# EAGLE board Schematic1 (EAGLE 9.6.2)
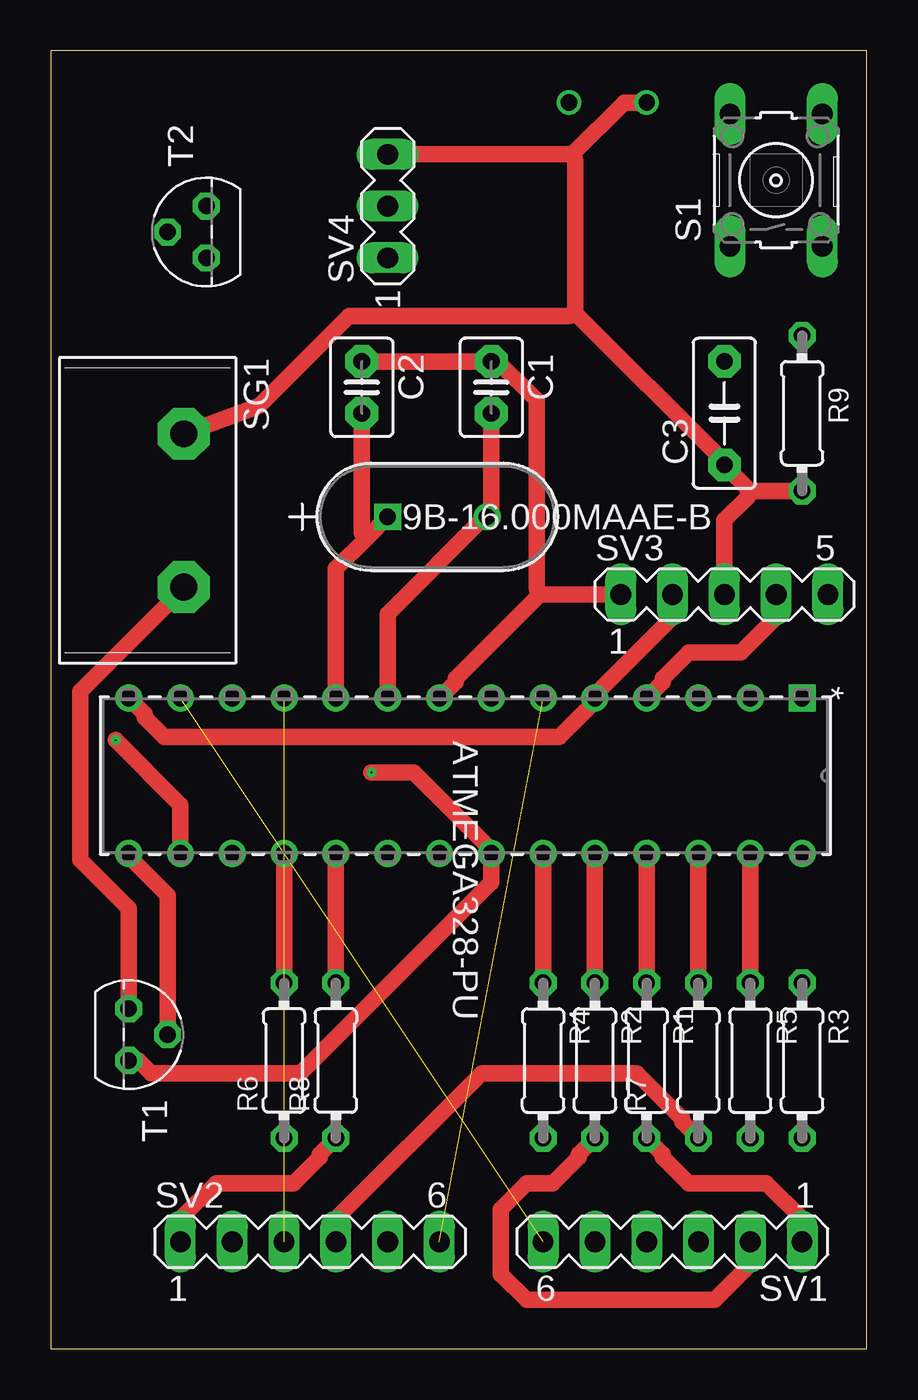
[diagram p0: board, top side]
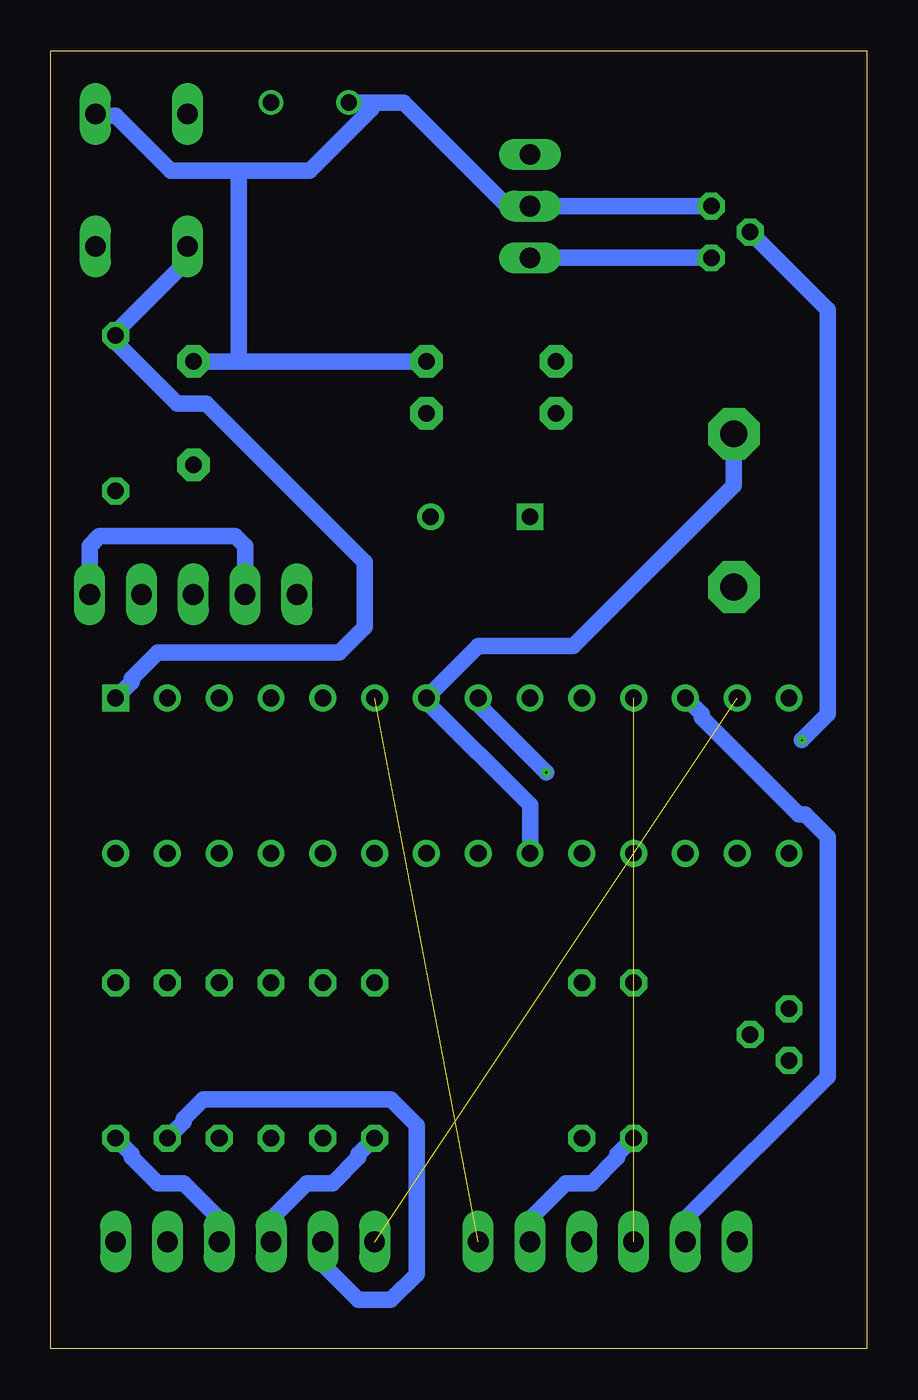
[diagram p1: board, bottom side, seen from below]

Size 40 x 63.65 mm. Coordinates in mm from the lower left corner, seen from the top.
Outline: 0,0 40,0 40,63.65 0,63.65 0,0
Copper layers (1*16): Top 0.035mm / dielectric 1.5mm / Bottom 0.035mm
Design rules "default *": minimum track width 0.8mm, minimum drill 0.08mm, track to track 0.8mm, track to pad 0.8mm, pad to pad 0.8mm, via to via 0.8mm, smd to smd 6mil, copper to edge 40mil, drill to drill 6mil, minimum pad ring 10mil, minimum via ring 8mil, stop-mask expansion 4mil, vias tented up to drill 0mil, thermal gap 10mil

## Footprints (pad centres in the part's own frame; a part is rotated, then mirrored left to right if it is on the bottom)
C2.5-3 = drill 0.813 pad 1.6 octagon: 1 -1.27,0; 2 1.27,0
C5B3 = drill 0.813 pad 1.6 octagon: 1 -2.54,0; 2 2.54,0
0204/7 = drill 0.813 octagon: 1 -3.81,0; 2 3.81,0
B3F-10XX = drill 1.016 long: 1 -3.251,2.261; 2 3.251,2.261; 3 -3.251,-2.261; 4 3.251,-2.261
B/C11S = drill 1.321 pad 2.54 octagon: 1 -3.759,0; 2 3.759,0
MA06-1 = drill 1.016 long: 1 -6.35,0; 2 -3.81,0; 3 -1.27,0; 4 1.27,0; 5 3.81,0; 6 6.35,0
MA05-1 = drill 1.016 long: 1 -5.08,0; 2 -2.54,0; 3 0,0; 4 2.54,0; 5 5.08,0
MA03-1 = drill 1.016 long: 1 -2.54,0; 2 0,0; 3 2.54,0
TO92 = drill 0.813 octagon: 1 1.27,0; 2 0,1.905; 3 -1.27,0
28P3_SPDIP28_SP_MCH = drill 0.813 pad 1.321 square: 1 0,0 | drill 0.813 pad 1.321: 2 0,-2.54; 3 0,-5.08; 4 0,-7.62; 5 0,-10.16; 6 0,-12.7; 7 0,-15.24; 8 0,-17.78; 9 0,-20.32; 10 0,-22.86; 11 0,-25.4; 12 0,-27.94; 13 0,-30.48; 14 0,-33.02; 15 7.62,-33.02; 16 7.62,-30.48; 17 7.62,-27.94; 18 7.62,-25.4; 19 7.62,-22.86; 20 7.62,-20.32; 21 7.62,-17.78; 22 7.62,-15.24; 23 7.62,-12.7; 24 7.62,-10.16; 25 7.62,-7.62; 26 7.62,-5.08; 27 7.62,-2.54; 28 7.62,0
9B-16.000MAAE-B_TXC = drill 0.813 pad 1.321 square: 1 0,0 | drill 0.813 pad 1.321: 2 4.877,0

## Placement (x,y rotation side)
C1  22pf  [C2.5-3]  21.59,47.15 270 top
C2  22pf  [C2.5-3]  15.24,47.15 270 top
C3  [C5B3]  33.02,45.88 90 top
R1  100ohm  [0204/7]  29.21,14.13 270 top
R2  100ohm  [0204/7]  26.67,14.13 270 top
R3  100ohm  [0204/7]  36.83,14.13 270 top
R4  100ohm  [0204/7]  24.13,14.13 270 top
R5  100ohm  [0204/7]  34.29,14.13 270 top
R6  100ohm  [0204/7]  11.43,14.13 90 top
R7  100ohm  [0204/7]  31.75,14.13 90 top
R8  100ohm  [0204/7]  13.97,14.13 90 top
R9  10K  [0204/7]  36.83,45.88 270 top
S1  [B3F-10XX]  35.56,57.31 90 top
SG1  B/C11S  [B/C11S]  6.51,41.11 270 top
SV1  [MA06-1]  30.48,5.24 180 top
SV2  [MA06-1]  12.7,5.24 0 top
SV3  [MA05-1]  33.02,36.99 0 top
SV4  [MA03-1]  16.51,56.04 90 top
T1  BC547  [TO92]  3.81,15.4 270 top
T2  BC547  [TO92]  7.62,54.77 90 top
U1  ATMEGA328-PU  [28P3_SPDIP28_SP_MCH]  36.83,31.91 270 top
XTAL1  9B-16.000MAAE-B  [9B-16.000MAAE-B_TXC]  16.51,40.8 0 top

## Library data of the parts
C1-C3 = capacitor-wima
R1-R9 = eagle-ltspice; SPICEMODEL: NONE; SPICEPREFIX: R
S1 = switch-omron; MPN: B3F-1000; OC_FARNELL: 176432; OC_NEWARK: 36M3542
SG1 = buzzer; OC_FARNELL: unknown; OC_NEWARK: unknown
SV1-SV4 = con-lstb; OC_FARNELL: unknown; OC_NEWARK: unknown
T1 T2 = transistor
U1 = ATMEGA328PU; COPYRIGHT: Copyright (C) 2023 Ultra Librarian. All rights reserved.; MANUFACTURER_PART_NUMBER: ATMEGA328-PU; MFR_NAME: Microchip
XTAL1 = cristaloss16mhz; COPYRIGHT: Copyright (C) 2023 Ultra Librarian. All rights reserved.; MANUFACTURER_PART_NUMBER: 9B-16.000MAAE-B; MFR_NAME: TXC

## Nets
GND: C1.1 C2.1 C3.2 S1.4 SV3.1 SV4.2 T1.1 T2.1 U1.8 U1.22
N$1: R1.2 SV1.1
N$2: R1.1 U1.25
N$3: R2.2 SV1.2
N$5: R3.2 SV1.3
N$6: R4.2 SV1.4
N$7: R2.1 U1.24
N$8: SV1.6 U1.13
N$9: R4.1 U1.23
N$10: R5.2 SV1.5
N$11: R5.1 U1.27
N$12: R8.1 SV2.1
N$13: R8.2 U1.19
N$14: SV2.2 U1.12
N$15: SV2.3 U1.11
N$16: R7.1 SV2.4
N$17: R7.2 U1.26
N$18: R6.1 SV2.5
N$19: R6.2 U1.18
N$20: SV2.6 U1.6
N$21: C1.2 U1.9 XTAL1.2
N$22: C2.2 U1.10 XTAL1.1
N$23: T1.2 U1.15
N$24: SV3.2 SV3.5 U1.5 U1.14
N$25: SV3.4 U1.4
N$26: SG1.2 T1.3
N$27: T2.2 U1.16
N$28: SV4.1 T2.3
N$29: R9.1 S1.1 U1.1
VCC: C3.1 R9.2 SG1.1 SV3.3 SV4.3 U1.7 U1.20

## Tracks (layer width: path | path; a pad name or v marks a point on that pad's centre or on a via)
GND  (via drill 0.08, 0.8)
  Top 0.8: T1.1 4.29,14.13 4.92,13.5 12.22,13.5 21.59,22.86 U1.22 21.43,24.61 17.78,28.26 v15.72,28.26 | U1.8 19.84,32.7 19.84,32.86 23.97,36.99 | SV3.1 23.97,36.99 | C2.1 C1.1 21.91,48.42 23.81,46.52 23.81,37.31 23.97,36.99
  Bottom 0.8: 24.29,61.12 22.7,61.12 17.62,56.04 SV4.2 T2.1 | 24.29,61.12 v25.4,61.12 | 30.8,57.79 27.31,57.79 24.29,60.8 24.29,61.12 | 30.8,57.79 34.13,57.79 36.83,60.49 37.78,60.49 S1.4 | C1.1 30.8,48.42 | 30.8,48.42 C3.2 | v15.72,28.26 19.05,31.59 U1.8 | 30.8,48.42 30.8,57.79
N$1
  Top 0.8: R1.2 30,9.53 30,9.37 31.27,8.1 35.08,8.1 36.83,6.35 SV1.1
N$2
  Top 0.8: U1.25 R1.1
N$3
  Top 0.8: R2.2 25.88,9.53 25.88,9.37 24.61,8.1 23.34,8.1 22.07,6.83 22.07,3.65 23.34,2.38 32.54,2.38 34.29,4.13 SV1.2
N$5
  Bottom 0.8: R3.2 36.04,9.53 36.04,9.37 34.77,8.1 33.5,8.1 31.75,6.35 SV1.3
N$6
  Bottom 0.8: R4.2 24.92,9.53 24.92,9.37 26.19,8.1 27.46,8.1 29.21,6.35 SV1.4
N$7
  Top 0.8: U1.24 R2.1
N$8  (1 unrouted)
N$9
  Top 0.8: U1.23 R4.1
N$10
  Bottom 0.8: R5.2 33.5,11.11 33.5,11.27 32.54,12.23 23.34,12.23 22.07,10.96 22.07,3.65 23.34,2.38 24.92,2.38 26.67,4.13 SV1.5
N$11
  Top 0.8: U1.27 R5.1
N$12
  Top 0.8: R8.1 13.18,9.53 13.18,9.37 11.91,8.1 8.1,8.1 6.35,6.35 SV2.1
N$13
  Top 0.8: U1.19 R8.2
N$14
  Bottom 0.8: U1.12 8.1,31.12 8.1,30.96 3.33,26.2 3.02,26.2 1.91,25.08 1.91,13.34 8.89,6.35 SV2.2
N$15  (1 unrouted)
N$16
  Top 0.8: R7.1 30.96,11.11 30.96,11.27 28.73,13.5 21.11,13.5 13.97,6.35 SV2.4
N$17
  Top 0.8: U1.26 R7.2
N$18
  Bottom 0.8: R6.1 12.22,9.53 12.22,9.37 13.49,8.1 14.76,8.1 16.51,6.35 SV2.5
N$19
  Top 0.8: U1.18 R6.2
N$20  (1 unrouted)
N$21
  Top 0.8: U1.9 16.51,36.04 21.27,40.8 XTAL1.2 21.59,41.12 C1.2
N$22
  Top 0.8: U1.10 13.97,38.26 15.48,39.77 | XTAL1.1 15.48,39.77 | C2.2 15.24,40.01 15.48,39.77
N$23
  Top 0.8: T1.2 5.72,22.23 3.81,24.13 U1.15
N$24
  Top 0.8: U1.14 4.6,31.12 4.6,30.96 5.56,30.01 24.92,30.01 26.67,31.75 U1.5 26.83,32.23 30.48,35.88 SV3.2
  Bottom 0.8: SV3.5 38.1,39.37 37.62,39.85 30.96,39.85 30.48,39.37 SV3.2
N$25
  Top 0.8: U1.4 30,32.7 30,32.86 31.27,34.13 33.81,34.13 35.56,35.88 SV3.4
N$26
  Top 0.8: T1.3 3.81,21.59 1.43,23.97 1.43,32.23 6.51,37.31 SG1.2
N$27  (via drill 0.08)
  Top 0.8: U1.16 6.35,26.67 v3.18,29.85
  Bottom 0.8: v3.18,29.85 1.91,31.12 1.91,50.96 T2.2
N$28
  Bottom 0.8: SV4.1 T2.3
N$29
  Bottom 0.8: U1.1 36.04,32.7 36.04,32.86 34.77,34.13 25.88,34.13 24.61,35.4 24.61,38.58 32.39,46.36 33.81,46.36 36.83,49.37 R9.1 36.67,50.01 33.34,53.34 33.34,53.98 S1.1
VCC  (via drill 0.8)
  Top 0.8: v29.21,61.12 28.1,61.12 25.56,58.58 | SV4.3 25.56,58.58 | 34.29,42.07 R9.2 | 34.29,42.07 C3.1 32.86,43.66 25.72,50.8 | SV3.3 33.02,40.64 34.13,41.75 34.29,42.07 | 25.72,50.8 25.72,58.26 25.56,58.58 | SG1.1 10.2,46.23 14.61,50.64 25.4,50.64 25.72,50.8
  Bottom 0.8: U1.20 16.51,26.67 21.59,31.75 U1.7 19.05,34.45 14.39,34.45 6.51,42.33 SG1.1